# Altium PCB PCB1.PcbDoc
Units mm, origin at the board's own origin, x right, y up, seen from the top; angles counter-clockwise.
Board outline 48.01 x 61.98 mm, 2 copper layers (Top Layer, Bottom Layer); 9 components, 31 nets, 86 pads, 20 vias.
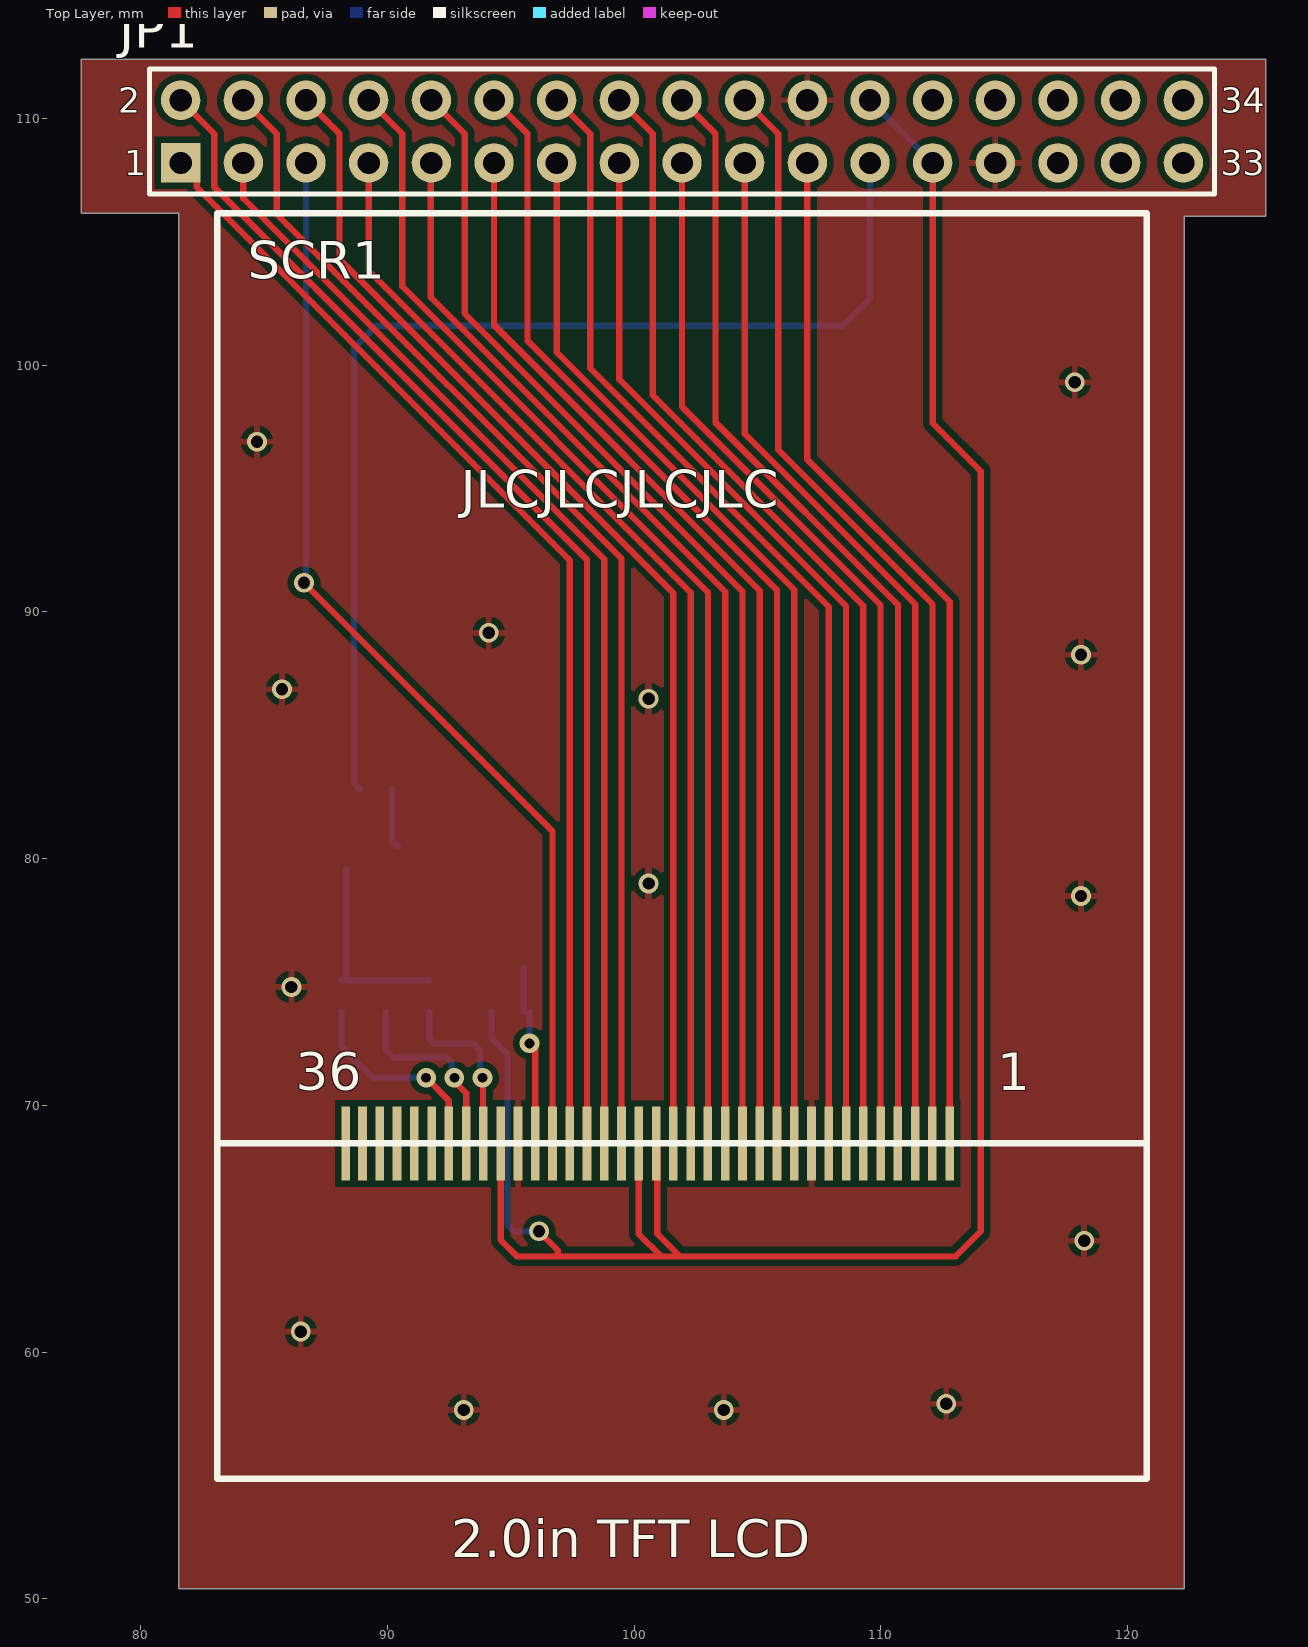
[diagram p0: Top Layer view]
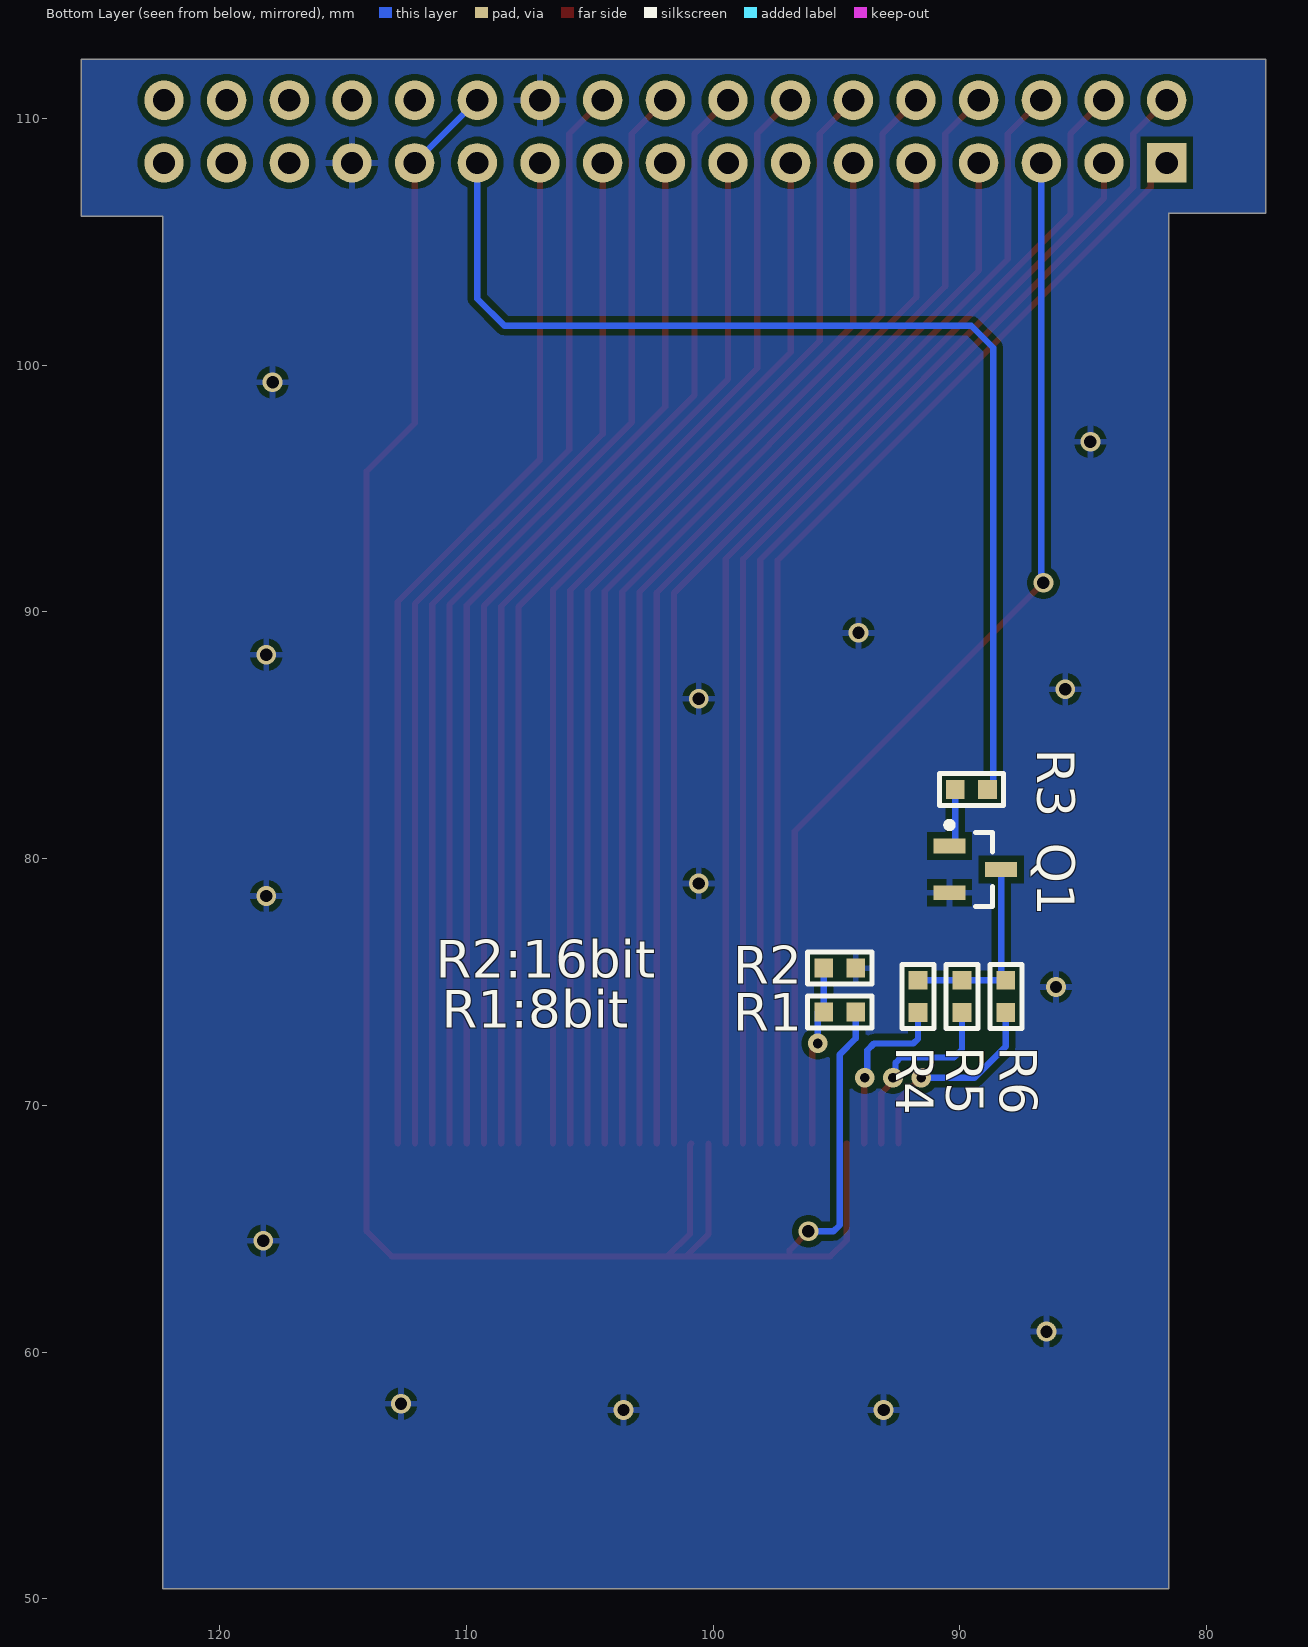
[diagram p1: Bottom Layer view, seen from below]

## Layer stack, top to bottom
Top Solder: solder mask 0.0102, Solder Resist, Dk 3.5
Top Layer: signal copper 0.0356
Dielectric 1: dielectric 0.32, FR-4, Dk 4.8
Bottom Layer: signal copper 0.0356
Bottom Solder: solder mask 0.0102, Solder Resist, Dk 3.5

## Board outline
77.597,106.172 81.534,106.172 81.534,50.419 122.301,50.419 122.301,106.045 125.603,106.045 125.603,112.395 77.597,112.395

## Design rules (kind name [scope] priority, off if disabled: settings)
Clearance [All] p1: gap=0.254 ignorepadtopadclearanceinfootprint=FALSE except(0: Arc-Hole Track-Hole SMDPad-Hole THPad-Hole Via-Hole Fill-Hole Poly-Hole Region-Hole Text-Hole)
PolygonConnect [All] p1: connectstyle=Relief reliefconductorwidth=0.254 reliefentries=4 polygonreliefangle="90 Angle" airgapwidth=0.254
RoutingVias [All] p1: holewidth=0.711 width=1.27 viastyle="Through Hole" minholewidth=0.711 minwidth=1.27 maxholewidth=0.711 maxwidth=1.27
SolderMaskExpansion [All] p1: expansion=0.102 istentingtop=FALSE
Width [All] p1: maxlimit=0.254 minlimit=0.254 preferedwidth=0.254
30 further rules are at their usual default settings.

## Components (designator, comment, footprint, x,y, rotation, side; value= is the part's Value field where it differs from the comment)
JP1 "Header 2X11" HDR2.54-LI-2x17P 101.938,109.474 r0 top
Q1 "SS8050" SOT23-3N 89.374,79.568 r180 bottom
R1 "1K" "R 0603_L" 94.869,73.787 r0 bottom
R2 "1K" "R 0603_L" 94.869,75.565 r180 bottom
R3 "1K" "R 0603_L" 89.535,82.804 r0 bottom
R4 "10R" "R 0603_L" 91.694,74.422 r270 bottom
R5 "10R" "R 0603_L" 89.916,74.422 r270 bottom
R6 "10R" "R 0603_L" 88.138,74.422 r270 bottom
SCR1 "Screen" 2.0inLCD 83.098,54.864 r0 top locked

## Footprints (in the part's own frame and the unit in brackets; to place one, negate y for a bottom-side part, rotate by r counter-clockwise, add the part's x,y. Pads: shape width x height; smd on the part's side, far side on the other; paste and mask are expansions set on the pad)
2.0inLCD [mm]
  rect 0.35x3 smd: 1(29.69,13.589) 1(29.69,13.589) 2(28.99,13.589) 3(28.29,13.589) 4(27.59,13.589) 5(26.89,13.589) 6(26.19,13.589) 7(25.49,13.589) 8(24.79,13.589) 9(24.09,13.589) 10(23.39,13.589) 11(22.69,13.589) 12(21.99,13.589) 13(21.29,13.589) 14(20.59,13.589) 15(19.89,13.589) 16(19.19,13.589) 17(18.49,13.589) 18(17.79,13.589) 19(17.09,13.589) 20(16.39,13.589) 21(15.69,13.589) 22(14.99,13.589) 23(14.29,13.589) 24(13.59,13.589) 25(12.89,13.589) 26(12.19,13.589) 27(11.49,13.589) 28(10.79,13.589) 29(10.09,13.589) 30(9.39,13.589) 31(8.69,13.589) 32(7.99,13.589) 33(7.29,13.589) 34(6.59,13.589) 35(5.89,13.589) 36(5.207,13.589)
  silkscreen extent 0,0 37.68,51.3
HDR2.54-LI-2x17P [mm] "双排排针，17x2脚  淘宝ID:黄晶宝石   店铺网址:https://shop463601444.taobao.com"
  rect 1.6x1.6 hole 0.9: 1(-20.32,-1.27)
  round 1.6 hole 0.9: 2(-20.32,1.27) 3(-17.78,-1.27) 4(-17.78,1.27) 5(-15.24,-1.27) 6(-15.24,1.27) 7(-12.7,-1.27) 8(-12.7,1.27) 9(-10.16,-1.27) 10(-10.16,1.27) 11(-7.62,-1.27) 12(-7.62,1.27) 13(-5.08,-1.27) 14(-5.08,1.27) 15(-2.54,-1.27) 16(-2.54,1.27) 17(0,-1.27) 18(0,1.27) 19(2.54,-1.27) 20(2.54,1.27) 21(5.08,-1.27) 22(5.08,1.27) 23(7.62,-1.27) 24(7.62,1.27) 25(10.16,-1.27) 26(10.16,1.27) 27(12.7,-1.27) 28(12.7,1.27) 29(15.24,-1.27) 30(15.24,1.27) 31(17.78,-1.27) 32(17.78,1.27) 33(20.32,-1.27) 34(20.32,1.27)
  silkscreen extent -21.59,-2.54 21.59,2.54, body extent -21.59,-2.54 21.59,2.54, height 8.5
"R 0603_L" [mil] "1/10W贴片电阻                 淘宝ID:黄晶宝石"
  rect 30x30 smd: 1(-25.59,0) 2(25.59,0)
  silkscreen extent -51,-26 51,26, body extent -31,-16 31,16, height 16
SOT23-3N [mm] "SOT23, 3-Leads, Body 2.9x1.3mm, Pitch 0.95mm, Lead Span 2.4mm, IPC Medium Density封装库来自淘宝卖家 ID：黄晶宝石"
  rect 1.3x0.6 smd: 1(-1.05,0.95) 2(-1.05,-0.95) 3(1.05,0)
  silkscreen extent -1.18,-1.5 0.7,1.92, body extent -1.2,-1.5 1.2,1.5, height 1.05

## Part data
JP1: library part "Header 17X2", "17*2P接插件", BOM名称=17*2P接插件, 封装库来自淘宝卖家  ID：黄晶宝石=其他店铺购入均为盗版假冒封装库，请立即申请退款, 技术支持， 联系售后=唯一出售店铺网址https://shop463601444.taobao.com
Q1: library part 8050-SMD, "高频放大-NPN型", BOM名称=高频放大-NPN型, 卖家免费技术支持，联系售后=唯一出售店铺网址https://shop463601444.taobao.com, 卖家免费查找封装，联系售后=唯一出售店铺网址https://shop463601444.taobao.com, 封装库来自淘宝卖家 ID：黄晶宝石=其他店铺购入均为假冒，请立即申请退款，本店奖励2~5元现金, 属性="40V 1.5A 1W 100MHZ"
R1 R2 R3 R4 R5 R6: library part R, "贴片电阻", BOM名称=贴片电阻, 优秀评价可免费更新=联系淘宝ID：黄晶宝石，获取更新版封装库, 本封装库来自淘宝卖家 ID：黄晶宝石=其他店铺购入均为盗版，请立即申请退款, 联系卖家，免费查找封装=唯一出售店铺网址https://shop463601444.taobao.com
SCR1: library part 2.0inLCD

## Via types
v1: diameter 0.8, hole 0.5, Top Layer to Bottom Layer, 16 vias
v2: diameter 0.8, hole 0.4, Top Layer to Bottom Layer, 4 vias

## Nets (pads, with @x,y where several pads share a name; then routed paths per layer and width w, separated by ;. In a path a pad name is that pad's centre, name@x,y a point inside that pad or via, vN(x,y) a via of type N, cw(c..) or ccw(c..) an arc to the next point about the centre after c; other vN are vias at no path point)
+3.3: JP1.24 JP1.25 R1.1 SCR1.18 SCR1.19 SCR1.27 | length 93.3
  Top Layer w0.254: SCR1.27 94.588,64.543 95.25,63.881 96.901,63.881 ; v1(96.139,64.897) 96.901,64.135 96.901,63.881 ; SCR1.19 100.188,64.785 101.092,63.881 ; SCR1.18 100.936,68.405 100.936,64.799 101.854,63.881 ; JP1.25 112.098,97.653 114.046,95.705 114.046,64.897 113.03,63.881 101.854,63.881 ; 96.901,63.881 101.092,63.881 ; 101.092,63.881 101.854,63.881
  Bottom Layer w0.254: R1.1 94.219,72.715 94.869,72.065 94.869,65.151 95.123,64.897 v1(96.139,64.897) ; JP1.24 JP1.25
+5: JP1.26
DB0: JP1.6 SCR1.17 | length 48.5
  Top Layer w0.254: JP1.6 88.057,109.385 88.057,104.301 101.588,90.77 SCR1.17
DB1: JP1.7 SCR1.16 | length 45.2
  Top Layer w0.254: JP1.7 89.238,103.838 102.288,90.788 SCR1.16
DB2: JP1.8 SCR1.15 | length 48
  Top Layer w0.254: JP1.8 90.597,109.385 90.597,103.198 102.988,90.807 SCR1.15
DB3: JP1.9 SCR1.14 | length 44.7
  Top Layer w0.254: JP1.9 91.759,108.185 91.759,102.754 103.688,90.825 SCR1.14
DB4: JP1.10 SCR1.13 | length 47.5
  Top Layer w0.254: JP1.10 93.137,109.385 93.137,102.094 104.388,90.843 SCR1.13
DB5: JP1.11 SCR1.12 | length 44.2
  Top Layer w0.254: JP1.11 94.318,101.632 105.088,90.862 SCR1.12
DB6: JP1.12 SCR1.11 | length 47
  Top Layer w0.254: JP1.12 95.677,109.385 95.677,100.991 105.788,90.88 SCR1.11
DB7: JP1.13 SCR1.10 | length 43.7
  Top Layer w0.254: JP1.13 96.858,100.529 106.488,90.899 SCR1.10
DB10: JP1.14 SCR1.8 | length 46.9
  Top Layer w0.254: JP1.14 98.217,109.385 98.217,99.888 107.888,90.217 SCR1.8
DB11: JP1.15 SCR1.7 | length 43.6
  Top Layer w0.254: JP1.15 99.398,99.425 108.588,90.235 SCR1.7
DB12: JP1.16 SCR1.6 | length 46.4
  Top Layer w0.254: JP1.16 100.757,109.385 100.757,98.785 109.288,90.254 SCR1.6
DB13: JP1.17 SCR1.5 | length 43.1
  Top Layer w0.254: JP1.17 101.938,98.322 109.988,90.272 SCR1.5
DB14: JP1.18 SCR1.4 | length 45.9
  Top Layer w0.254: JP1.18 103.297,109.385 103.297,97.682 110.688,90.291 SCR1.4
DB15: JP1.19 SCR1.3 | length 42.6
  Top Layer w0.254: JP1.19 104.478,97.219 111.388,90.309 SCR1.3
DB16: JP1.20 SCR1.2 | length 45.4
  Top Layer w0.254: JP1.20 105.837,109.385 105.837,96.579 112.088,90.328 SCR1.2
DB17: JP1.21 SCR1.1 | length 42.1
  Top Layer w0.254: JP1.21 107.018,96.182 112.788,90.412 SCR1.1@112.788,68.453
GND: JP1.22 JP1.27 Q1.2 R2.2 SCR1.9 SCR1.26
  other v1: 93.091,57.658 103.632,57.658 112.649,57.912 86.487,60.833 118.237,64.516 86.106,74.803 118.11,78.486 100.584,78.994 100.584,86.487 85.725,86.868 118.11,88.265 94.107,89.154 84.709,96.901 117.856,99.314
LCD_BL: JP1.23 R3.1 | length 45.2
  Bottom Layer w0.254: R3.1 88.646,83.043 88.646,100.711 89.535,101.6 108.458,101.6 109.558,102.7 JP1.23
LCD_CS: JP1.1 SCR1.23 | length 46.3
  Top Layer w0.254: JP1.1 82.264,107.558 82.264,107.22 97.388,92.096 SCR1.23
LCD_IM0: R1.2 R2.1 SCR1.25 | length 7.2
  Top Layer w0.254: v2(95.758,72.517) 95.988,72.287 SCR1.25
  Bottom Layer w0.254: R1.2 R2.1 ; v2(95.758,72.517) R1.2@95.758,73.787
LCD_RD: JP1.4 SCR1.20 | length 48.6
  Top Layer w0.254: JP1.4 85.517,109.385 85.517,106.122 99.488,92.151 SCR1.20
LCD_RS: JP1.2 SCR1.22 | length 49.1
  Top Layer w0.254: JP1.2 82.977,109.385 82.977,107.225 98.088,92.114 SCR1.22
LCD_RST: JP1.5 SCR1.24 | length 44
  Top Layer w0.254: v1(86.614,91.186) 96.688,81.112 SCR1.24
  Bottom Layer w0.254: v1(86.614,91.186) 86.698,91.27 JP1.5
LCD_WR: JP1.3 SCR1.21 | length 45.8
  Top Layer w0.254: JP1.3 84.158,106.763 98.788,92.133 SCR1.21
NetQ1_1: Q1.1 R3.2 | length 2.4
  Bottom Layer w0.254: R3.2 90.185,80.691 90.358,80.518 Q1.1
NetQ1_3: Q1.3 R4.1 R5.1 R6.1 | length 8.1
  Bottom Layer w0.254: Q1.3 88.324,75.258 R6.1 R5.1 R4.1
NetR4_2: R4.2 SCR1.28 | length 7.2
  Top Layer w0.254: v2(93.853,71.12) 93.871,71.102 93.871,68.47 SCR1.28
  Bottom Layer w0.254: R4.2 91.694,72.707 91.892,72.51 93.479,72.51 93.749,72.24 93.749,71.224 v2(93.853,71.12)
NetR5_2: R5.2 SCR1.29 | length 7.9
  Top Layer w0.254: v2(92.71,71.12) 92.71,70.972 93.188,70.494 SCR1.29
  Bottom Layer w0.254: R5.2 89.916,72.263 90.234,71.945 92.393,71.945 92.606,71.732 92.606,71.224 v2(92.71,71.12)
NetR6_2: R6.2 SCR1.30 | length 8.4
  Top Layer w0.254: v2(91.567,71.12) 92.488,70.199 SCR1.30
  Bottom Layer w0.254: R6.2 88.138,72.39 89.408,71.12 v2(91.567,71.12)
pads on no net: JP1.28 JP1.29 JP1.30 JP1.31 JP1.32 JP1.33 JP1.34 SCR1.31 SCR1.32 SCR1.33 SCR1.34 SCR1.35 SCR1.36

## Polygon pours and split planes (outlines as drawn)
GND on Bottom Layer "GND_L02_P000" (solid, remove dead copper, pour order 0): 77.597,112.395 77.597,106.172 81.534,106.172 81.534,50.419 122.301,50.419 122.301,106.045 125.603,106.045 125.603,112.395
GND on Top Layer "GND_L01_P001" (solid, remove dead copper, pour order 1): 77.597,112.395 77.597,106.172 81.534,106.172 81.534,50.419 122.301,50.419 122.301,106.045 125.603,106.045 125.603,112.395

## Silkscreen, mask and mechanical layers (free items; w line width, h text height)
Top Overlay:
  text "JLCJLCJLCJLC" at 92.964,94.234 h1.52
  text "2.0in TFT LCD" at 92.583,51.689 h1.52
Bottom Overlay:
  text "R2:16bit" at 111.252,75.184 h1.52
  text "R1:8bit" at 110.998,73.152 h1.52
Mechanical 1:
  circle w0.254: c120.015,52.705 r1.5
  circle w0.254: c84.201,52.705 r1.5
  lines w0.254: 77.597,106.172 81.534,106.172 81.534,50.419 122.301,50.419 122.301,106.045 125.603,106.045 125.603,112.395 77.597,112.395 77.597,106.172

## Text inside footprints (layer, text, board x,y; h text height)
JP1: Top Overlay "2" at 79.078,110.236 h1.02; Top Overlay "1" at 79.332,107.696 h1.02; Top Overlay "33" at 123.782,107.696 h1.02; Top Overlay "34" at 123.782,110.236 h1.02
SCR1: Top Overlay "1" at 114.721,70.612 h1.52; Top Overlay "36" at 86.273,70.612 h1.52